# EAGLE board drone_controller (EAGLE 9.6.2)
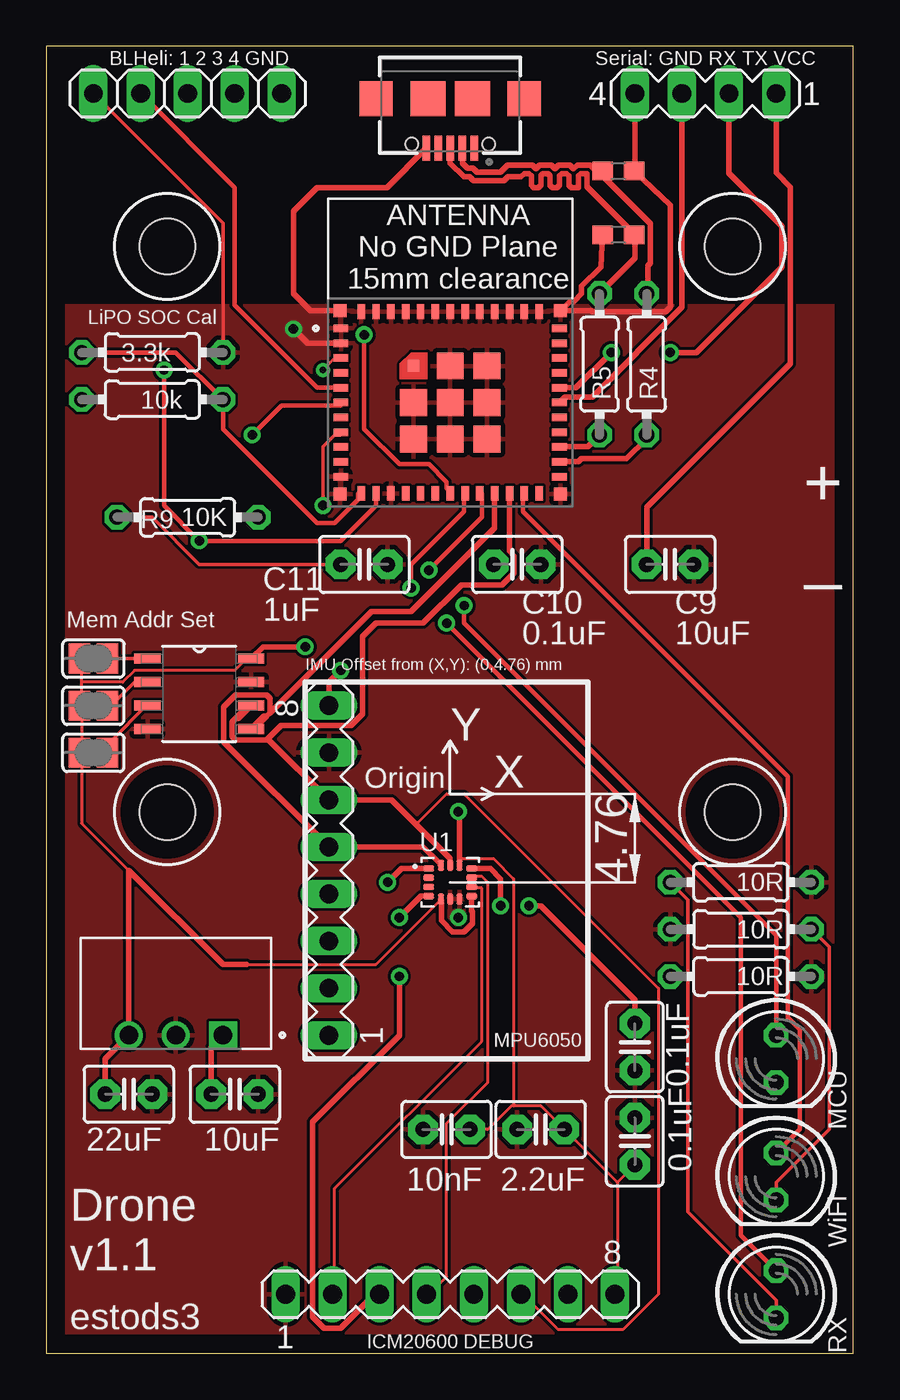
[diagram p0: board, top side]
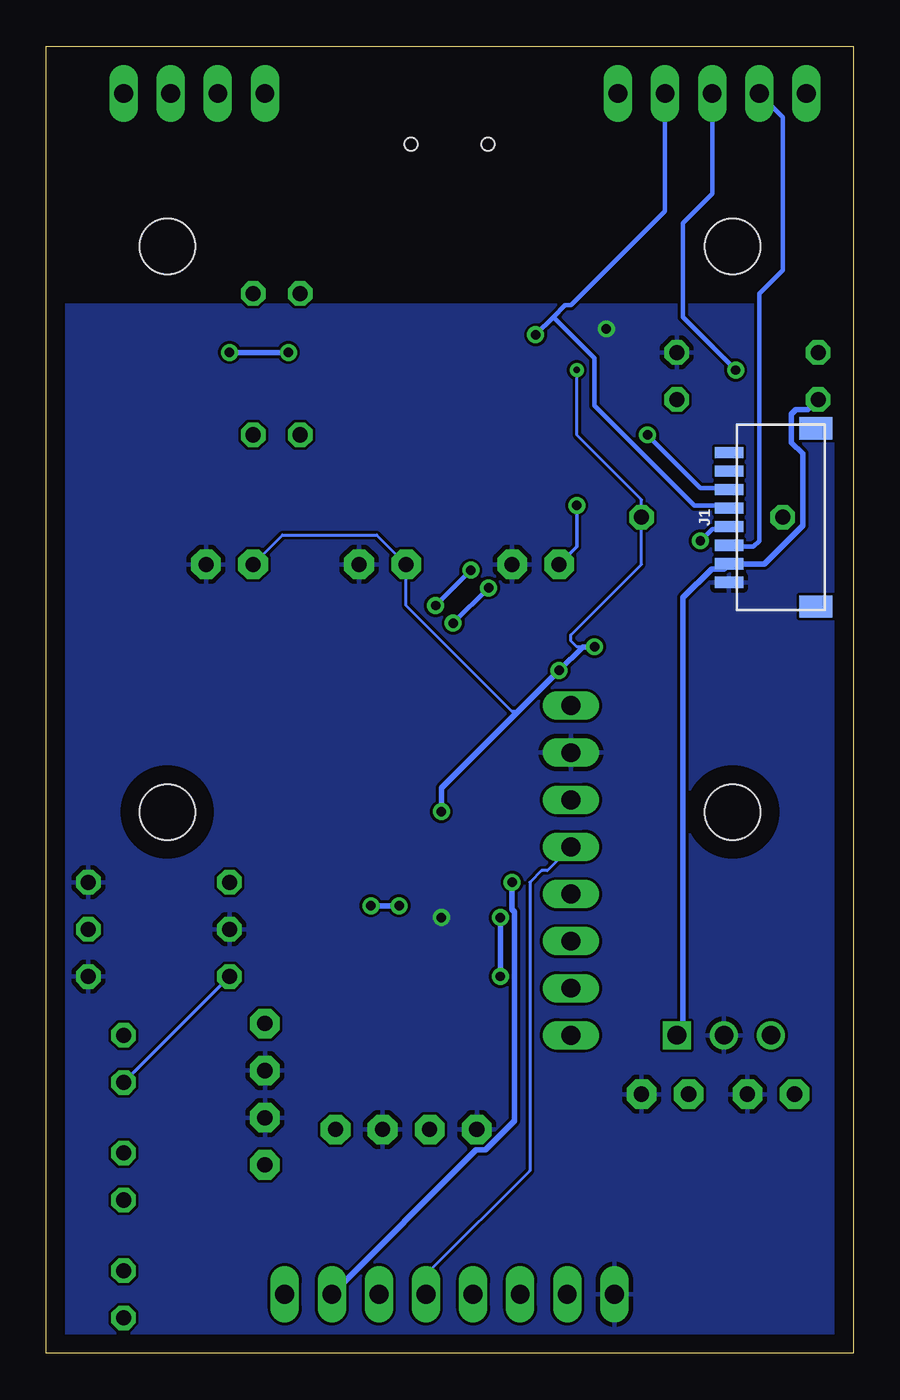
[diagram p1: board, bottom side, seen from below]

Size 43.54 x 70.49 mm. Coordinates in mm from the lower left corner, seen from the top.
Outline: 0,0 43.54,0 43.54,70.49 0,70.49 0,0
Copper layers (1*16): Top 0.035mm / dielectric 1.5mm / Bottom 0.035mm
Design rules "default": minimum track width 6mil, minimum drill 0.35mm, track to track 6mil, track to pad 6mil, pad to pad 6mil, via to via 6mil, smd to smd 6mil, copper to edge 40mil, drill to drill 6mil, minimum pad ring 10mil, minimum via ring 8mil, stop-mask expansion 4mil, vias tented up to drill 0mil, thermal gap 10mil
Net classes: 0 default: width 0.178 mm, drill 0.508 mm, clearance 0.051 mm; 1 Power: width 0.305 mm, drill 0.508 mm, clearance 0.254 mm; 3 Chip Power: width 0.025 mm, drill 0.051 mm, clearance 0.254 mm to class 2, clearance 0.127 mm; 4 GPIO: width 0.254 mm, drill 0.508 mm, clearance 0.254 mm to class 2, clearance 0.254 mm; 5 IMU: width 0.025 mm, drill 0.025 mm, clearance 0.025 mm to class 0
Holes 3 mm at 6.52,59.69 6.52,29.19 37.02,29.19 37.02,59.69

## Footprints (pad centres in the part's own frame; a part is rotated, then mirrored left to right if it is on the bottom)
C2.5-3 = drill 0.813 pad 1.6 octagon: 1 -1.27,0; 2 1.27,0
C0603 = smd 1.1 x 1: 1 -0.85,0; 2 0.85,0
SM08B-SRSS-TB = smd 0.6 x 1.55: 1 -3.5,4.675; 2 -2.5,4.675; 3 -1.5,4.675; 4 -0.5,4.675; 5 0.5,4.675; 6 1.5,4.675; 7 2.5,4.675; 8 3.5,4.675 | smd 1.2 x 1.8: M1 4.8,0; M2 -4.8,0
629105136821 = smd 0.4 x 1.35: 1 -1.3,2.325; 2 -0.65,2.325; 3 0,2.325; 4 0.65,2.325; 5 1.3,2.325 | smd 1.8 x 1.9: S1 -4,-0.35; S4 4,-0.35 | smd 1.9 x 1.9: S2 -1.2,-0.35; S3 1.2,-0.35 | hole 0.7: -2.075,2.1; 2.075,2.1
1X05 = drill 1.016 long: 1 -5.08,0; 2 -2.54,0; 3 0,0; 4 2.54,0; 5 5.08,0
LED5MM = drill 0.813 octagon: A -1.27,0; K 1.27,0
0204/7 = drill 0.813 octagon: 1 -3.81,0; 2 3.81,0
SJ = smd 1.168 x 1.6: 1 -0.762,0; 2 0.762,0
MA08-1 = drill 1.016 long: 1 -8.89,0; 2 -6.35,0; 3 -3.81,0; 4 -1.27,0; 5 1.27,0; 6 3.81,0; 7 6.35,0; 8 8.89,0
MA04-1 = drill 1.016 long: 1 -3.81,0; 2 -1.27,0; 3 1.27,0; 4 3.81,0
PQFN50P250X300X97-14N = smd 0.61 x 0.35: 1 -1.16,0.75; 2 -1.16,0.25; 3 -1.16,-0.25; 4 -1.16,-0.75; 8 1.16,-0.75; 9 1.16,-0.25; 10 1.16,0.25; 11 1.16,0.75 | smd 0.35 x 0.61: 5 -0.5,-0.91; 6 0,-0.91; 7 0.5,-0.91; 12 0.5,0.91; 13 0,0.91; 14 -0.5,0.91
CONV_PXO7803-500-S = drill 1 square: 1 0,0 | drill 1: 2 2.54,0; 3 5.08,0
SOIC127P600X175-8N = smd 1.422 x 0.533: 1 -2.794,1.905; 2 -2.794,0.635; 3 -2.794,-0.635; 4 -2.794,-1.905; 5 2.794,-1.905; 6 2.794,-0.635; 7 2.794,0.635; 8 2.794,1.905
XCVR_ESP32-C3-MINI-1-N4 = smd 0.8 x 0.4: 1 -5.9,1.3; 2 -5.9,0.5; 3 -5.9,-0.3; 4 -5.9,-1.1; 5 -5.9,-1.9; 6 -5.9,-2.7; 7 -5.9,-3.5; 8 -5.9,-4.3; 9 -5.9,-5.1; 10 -5.9,-5.9; 11 -5.9,-6.7; 25 5.9,-6.7; 26 5.9,-5.9; 27 5.9,-5.1; 28 5.9,-4.3; 29 5.9,-3.5; 30 5.9,-2.7; 31 5.9,-1.9; 32 5.9,-1.1; 33 5.9,-0.3; 34 5.9,0.5; 35 5.9,1.3 | smd 0.4 x 0.8: 12 -4.8,-7.6; 13 -4,-7.6; 14 -3.2,-7.6; 15 -2.4,-7.6; 16 -1.6,-7.6; 17 -0.8,-7.6; 18 0,-7.6; 19 0.8,-7.6; 20 1.6,-7.6; 21 2.4,-7.6; 22 3.2,-7.6; 23 4,-7.6; 24 4.8,-7.6; 36 4.8,2.2; 37 4,2.2; 38 3.2,2.2; 39 2.4,2.2; 40 1.6,2.2; 41 0.8,2.2; 42 0,2.2; 43 -0.8,2.2; 44 -1.6,2.2; 45 -2.4,2.2; 46 -3.2,2.2; 47 -4,2.2; 48 -4.8,2.2 | smd 0.6 x 0.6: 49_1 -1.975,-0.725 | smd 1.45 x 1.45: 49_2 0,-0.725; 49_3 1.975,-0.725; 49_4 1.975,-2.7; 49_5 1.975,-4.675; 49_6 0,-4.675; 49_7 -1.975,-4.675; 49_8 -1.975,-2.7; 49_9 0,-2.7 | smd 0.7 x 0.7: 50 5.95,2.25; 51 5.95,-7.65; 52 -5.95,-7.65; 53 -5.95,2.25

## Placement (x,y rotation side)
C1  10uF  [C2.5-3]  10.16,13.97 0 top
C2  22uF  [C2.5-3]  4.45,13.97 0 top
C3  0.1uF  [C0603]  30.86,63.75 0 top
C4  0.1uF  [C2.5-3]  31.75,11.43 90 top
C5  2.2uF  [C2.5-3]  26.67,12.07 180 top
C6  10nF  [C2.5-3]  21.59,12.07 180 top
C7  0.1uF  [C2.5-3]  31.75,16.51 270 top
C8  0.1uF  [C0603]  30.86,60.32 180 top
C9  10uF  [C2.5-3]  33.65,42.55 0 top
C10  0.1uF  [C2.5-3]  25.4,42.55 0 top
C11  1uF  [C2.5-3]  17.14,42.55 0 top
J1  SM08B-SRSS-TB  [SM08B-SRSS-TB]  2.03,45.08 90 bottom
J2  629105136821  [629105136821]  21.79,67.31 180 top
JP1  [1X05]  7.62,67.94 0 top
LED4  [LED5MM]  39.37,15.88 270 top
LED5  [LED5MM]  39.37,9.52 270 top
LED6  [LED5MM]  39.37,3.18 270 top
R1  10R  [0204/7]  37.46,22.86 180 top
R2  10R  [0204/7]  37.46,25.4 0 top
R3  10k  [0204/7]  5.71,51.44 180 top
R4  0R  [0204/7]  32.38,53.34 90 top
R5  0R  [0204/7]  29.84,53.34 90 top
R7  3.3k  [0204/7]  5.71,53.98 180 top
R8  10R  [0204/7]  37.46,20.32 0 top
R9  10K  [0204/7]  7.62,45.09 0 top
SJ1  [SJ]  2.54,37.47 0 top
SJ2  [SJ]  2.54,34.92 0 top
SJ3  [SJ]  2.54,32.38 0 top
SV1  [MA08-1]  21.79,3.18 0 top
SV2  [MA08-1]  15.24,26.04 90 top
SV3  [MA04-1]  35.56,67.94 180 top
U1  ICM-20600  [PQFN50P250X300X97-14N]  21.79,25.4 0 top
U2  PXO7803-500-S  [CONV_PXO7803-500-S]  9.53,17.14 180 top
U3  M24C02-WMN6TP  [SOIC127P600X175-8N]  8.26,35.56 0 top
U4  ESP32-C3-MINI-1-N4  [XCVR_ESP32-C3-MINI-1-N4]  21.79,53.98 0 top

## Library data of the parts
C1 C2 C4-C7 C9-C11 = capacitor-wima
C3 C8 = rcl; SPICEPREFIX: C
J1 = con-JST-SH
J2 = Eagle_WR-USB (rev22c); APPLICATION: Micro USB 2.0; DATASHEET-URL: https://www.we-online.com/redexpert/spec/629105136821?ae; GERDER: Receptacle; INTERFACE-TYPE: Type B; IR: 1.0A; MOUNT: SMT; PACKAGING: Tape and Reel; PART-NUMBER: 629105136821; PINS: 5; TYPE: Horizontal; WORKING-VOLTAGE: 30V(AC)
JP1 = pinhead
LED4-LED6 = led
R1-R5 R7-R9 = rcl; SPICEPREFIX: R
SJ1-SJ3 = jumper
SV1-SV3 = con-lstb; OC_FARNELL: unknown; OC_NEWARK: unknown
U1 = ICM-20600; AVAILABILITY: In Stock; DESCRIPTION: Accelerometer, Gyroscope, 6 Axis Sensor I²C, SPI Output; MF: TDK InvenSense; MP: ICM-20600; PACKAGE: PQFN-14N TDK-InvenSense; PRICE: None; PURCHASE-URL: https://pricing.snapeda.com/search/part/ICM-20600/?ref=eda
U2 = PXO7803-500-S; MANUFACTURER: CUI; MAXIMUM_PACKAGE_HEIGHT: 8.61mm; PARTREV: 08/22/2022; SNAPEDA_PN: PXO7803-500-S; STANDARD: Manufacturer Recommendations
U3 = M24C02-WMN6TP; AVAILABILITY: In Stock; DESCRIPTION: EEPROM Memory IC 2Kb (256 x 8) I²C 400 kHz 900 ns 8-SOIC; MF: STMicroelectronics; MP: M24C02-WMN6TP; PACKAGE: SO-8 STMicroelectronics; PRICE: None; PURCHASE-URL: https://pricing.snapeda.com/search?q=M24C02-WMN6TP&ref=eda
U4 = ESP32-C3-MINI-1-N4; AVAILABILITY: In Stock; DESCRIPTION: Bluetooth, WiFi 802.11b/g/n, Bluetooth v5.0 Transceiver Module 2.412GHz ~ 2.484GHz PCB Trace Surface Mount; MF: Espressif Systems; MP: ESP32-C3-MINI-1-N4; PACKAGE: SMD-53 Espressif Systems; PRICE: None; PURCHASE-URL: https://pricing.snapeda.com/search?q=ESP32-C3-MINI-1-N4&ref=eda

## Nets
3V3 [IMU]: C2.1 C4.1 C5.1 C6.1 C9.1 C10.1 R9.2 SJ1.1 SJ2.1 SJ3.1 SV1.8 SV2.8 SV3.1 U1.5 U1.8 U1.12 U2.3 U3.8 U4.3
AD0 [IMU]: SV1.7 U1.1
CURR: J1.7
FSYNC [IMU]: SV1.4 U1.10
GND: C1.2 C2.2 C3.2 C4.2 C5.2 C6.2 C7.2 C8.2 C9.2 C10.2 C11.2 J1.1 J2.5 JP1.1 R1.2 R2.2 R7.1 R8.2 SV1.1 SV2.7 SV3.4 U1.6 U1.7 U2.2 U3.4 U3.7 U4.1 U4.2 U4.11 U4.14 U4.36 U4.37 U4.38 U4.39 U4.40 U4.41 U4.42 U4.43 U4.44 U4.45 U4.46 U4.47 U4.48 U4.49_1 U4.49_2 U4.49_3 U4.49_4 U4.49_5 U4.49_6 U4.49_7 U4.49_8 U4.49_9 U4.50 U4.51 U4.52 U4.53
GPIO_BATT_SOC [GPIO]: R3.1 R7.2 U4.12
GPIO_LED_HEARTBEAT [GPIO]: LED4.A U4.20
GPIO_LED_WIFI_CONN [GPIO]: LED5.A U4.23
GPIO_LED_WIFI_RX [GPIO]: LED6.A U4.19
INT1 [IMU]: SV1.3 U1.4
INT2 [IMU]: SV1.2 U1.9
N$1: C7.1 U1.11
N$2: JP1.5
N$3: C11.1 R9.1 U4.8
N$6: SJ1.2 U3.1
N$7: SJ2.2 U3.2
N$8: SJ3.2 U3.3
N$9: LED5.K R1.1
N$10: LED4.K R8.1
N$14: LED6.K R2.1
PWM_MOTOR_FL [GPIO]: J1.4 JP1.3 U4.13
PWM_MOTOR_FR [GPIO]: J1.3 JP1.2 U4.5
PWM_MOTOR_RL [GPIO]: J1.6 U4.6
PWM_MOTOR_RR [GPIO]: J1.5 JP1.4 U4.18
RX: SV3.3 U4.30
SCL [IMU]: SV1.6 SV2.6 U1.13 U3.6 U4.22
SDA [IMU]: SV1.5 SV2.5 U1.14 U3.5 U4.21
TEL: J1.8
TX: SV3.2 U4.31
USB_D_N [USB]: C3.1 J2.2 R4.2
USB_D_P [USB]: C8.1 J2.3 R5.2
USB_RD_N: R4.1 U4.26
USB_RD_P: R5.1 U4.27
USB_VCC [Power]: J2.1
VCC [Power]: C1.1 J1.2 R3.2 U2.1

## Tracks (layer width: path | path; a pad name or v marks a point on that pad's centre or on a via)
3V3  (via drill 0.35, 0.51)
  Top 0.152: 10.79,20.95 17.78,20.95 21.27,24.45 U1.5 | C6.1 23.81,12.07 25.08,13.34 25.21,13.34 | 25.21,13.34 26.67,13.34 C5.1 30.8,9.21 | 30.8,9.21 30.8,3.18 SV1.8 | C4.1 30.8,9.21 | v14.92,53.02 15.56,53.66 15.88,53.66 U4.3 | 1.9,34.92 1.9,32.38 | 1.9,34.92 1.9,36.2 | 1.9,36.2 1.9,37.47 SJ1.1 | 1.9,34.92 SJ2.1 | 1.9,36.2 4.13,36.2 4.76,36.83 10.16,36.83 10.79,37.47 U3.8 | 25.21,13.34 25.21,25.59 24.13,26.67 22.29,26.67 22.23,26.67 | 4.45,26.04 1.9,28.58 1.9,32.38 | 1.9,32.38 SJ3.1
  Top 0.305: C9.1 32.38,45.62 40.14,53.38 40.14,62.89 39.37,63.66 SV3.1 | SV2.8 15.24,36.2 v15.88,36.83 | U3.8 11.68,38.1 v13.97,38.1 | v22.23,29.21 22.29,29.15 22.29,26.67 U1.12 | 21.27,24.45 21.31,24.41 21.31,23.33 21.91,22.73 22.54,22.73 22.99,23.18 22.99,23.81 22.95,23.85 U1.8 | C2.1 3.18,15.88 U2.3 4.45,26.04 9.53,20.95 10.79,20.95
  Bottom 0.152: v14.92,53.02 14.92,49.53 11.43,46.04 R9.2 11.43,42.55 15.24,38.73 15.24,38.42 14.92,38.1 14.61,38.1 | C9.1 30.8,44.13 25.72,44.13 C10.1 24.13,40.32 18.41,34.61 18.1,34.61
  Bottom 0.305: v13.97,38.1 14.61,38.1 v15.88,36.83 18.1,34.61 22.23,30.48 v22.23,29.21
AD0  (via drill 0.51)
  Top 0.305: U1.1 19.16,26.15 v18.41,25.4
  Bottom 0.305: v18.41,25.4 18.41,23.94 18.29,23.81 18.29,12.53 19.86,10.96 20.35,10.96 SV1.7
FSYNC
  Top 0.152: U1.10 23.18,25.72 23.5,25.72 23.81,25.4 23.81,14.61 21.59,12.38 21.59,4.13 20.64,3.18 SV1.4
GND  (via drill 0.51)
  Top 0.178: JP1.1 9.53,60.96 R7.1
  Top 0.305: C8.2 29.91,58.58 28.88,57.55 28.88,57.15 28.45,56.72 28.23,56.72 U4.50 29.41,56.23 29.45,56.18 33.42,56.18 33.65,56.42 33.65,61.91 C3.2 31.75,63.82 SV3.4 | J2.5 18.37,62.87 14.61,62.87 13.34,61.6 13.34,57.15 14.26,56.23 U4.53 | U4.2 14.11,54.48 v13.34,55.24
  other vias: 22.23,23.49
  pour Top: -1.27,56.51 44.45,56.51 44.45,0 -1.27,0
  pour Bottom: -1.27,56.51 44.45,56.51 44.45,0 -1.27,0
GPIO_BATT_SOC
  Top 0.254: U4.12 16.83,46.35 16.83,46.04 15.56,44.77 14.61,44.77 9.53,49.85 R3.1 6.99,53.98 R7.2
GPIO_LED_HEARTBEAT  (via drill 0.51)
  Top 0.254: v20.64,42.23 23.5,45.09 23.5,46.35 U4.20 | v22.54,40.32 22.54,39.37 39.37,22.54 LED4.A
  Bottom 0.254: v22.54,40.32 v20.64,42.23
GPIO_LED_WIFI_CONN
  Top 0.254: LED5.A 40.64,12.07 40.64,17.46 40,18.1 40,31.12 25.72,45.4 25.72,46.35 U4.23
GPIO_LED_WIFI_RX  (via drill 0.51)
  Top 0.254: v19.68,41.27 19.68,42.55 22.54,45.4 22.54,46.35 U4.19 | v21.59,39.37 37.46,23.49 37.46,6.35 LED6.A
  Bottom 0.254: v21.59,39.37 v19.68,41.27
INT1  (via drill 0.51)
  Top 0.305: U1.4 20.21,24.65 v19.05,23.49 | SV1.3 17.71,3.18 15.88,1.35 15,1.35 14.37,1.97 14.37,12.47 19.05,17.14 v19.05,20.32
  Bottom 0.305: v19.05,20.32 v19.05,23.49
INT2
  Top 0.152: U1.9 23.18,25.08 23.5,25.08 23.5,16.83 15.56,8.89 15.56,3.18 SV1.2
N$1  (via drill 0.51)
  Top 0.305: U1.11 23.95,26.15 24.51,25.59 v24.51,24.13 | C7.1 31.75,19.05 26.67,24.13 v26.04,24.13
  Bottom 0.305: v24.51,24.13 v26.04,24.13
N$3  (via drill 0.51)
  Top 0.178: v14.92,45.72 14.92,48.9 15.56,49.53 15.88,49.53 U4.8 | R9.1 5.71,45.09 8.26,42.55 C11.1
  Bottom 0.178: v14.92,45.72 14.92,43.5 C11.1
N$6
  Top 0.178: SJ1.2 U3.1
N$7
  Top 0.178: U3.2 4.76,36.2 3.49,34.92 SJ2.2
N$8
  Top 0.178: U3.3 5.4,34.92 3.49,33.02 3.49,32.38 SJ3.2
N$9
  Top 0.178: LED5.K 39.37,9.21 42.23,12.07 42.23,21.91 R1.1
N$10
  Bottom 0.178: LED4.K R8.1
N$14
  Top 0.178: LED6.K 39.37,2.86 34.61,7.62 34.61,24.45 R2.1
PWM_MOTOR_FL  (via drill 0.51)
  Top 0.254: U4.13 17.78,46.35 17.78,45.72 15.88,43.81 v8.26,43.81 6.35,45.72 v6.35,53.02
  Bottom 0.254: v8.26,43.81 7.62,44.45 6.99,44.45 J1.4 | JP1.3 7.62,62.55 9.21,60.96 9.21,55.88 v6.35,53.02
PWM_MOTOR_FR
  Top 0.254: JP1.2 10.16,62.87 10.16,56.51 14.61,52.07 15.88,52.07 U4.5
  Bottom 0.254: JP1.2 3.81,66.68 3.81,58.42 5.08,57.15 5.08,43.81 5.4,43.5 6.67,43.5 J1.3
PWM_MOTOR_RL  (via drill 0.51)
  Top 0.254: v11.11,49.53 12.7,51.12 15.88,51.12 U4.6
  Bottom 0.254: v11.11,49.53 8.26,46.67 6.99,46.67 J1.6
PWM_MOTOR_RR  (via drill 0.51)
  Top 0.254: v17.14,54.93 17.14,49.85 19.05,47.94 20.64,47.94 21.59,46.99 21.59,46.67 U4.18
  Bottom 0.254: 16.19,55.88 15.56,56.51 15.24,56.51 10.16,61.6 JP1.4 | 16.19,55.88 v17.14,54.93 | 16.19,55.88 13.97,53.66 13.97,51.12 8.57,45.72 6.99,45.72 J1.5
RX
  Top 0.305: U4.30 27.98,51.57 29.45,51.57 34.29,56.41 SV3.3
SCL
  Top 0.152: 19.94,28.52 21.59,30.16 22.54,30.16 33.02,19.68 33.02,3.18 31.11,1.27 27.62,1.27 25.72,3.18 SV1.6
  Top 0.305: U4.22 24.99,43.25 25.23,43 25.23,42.09 24.59,41.44 22.39,41.44 20.32,39.37 17.78,39.37 17.07,38.66 17.07,34.48 16.44,33.86 12.66,33.86 11.89,33.08 | 10.21,34.23 10.91,34.92 U3.6 10.35,34.23 10.21,34.23 | U1.13 21.77,26.33 21.77,26.69 19.94,28.52 18.61,29.84 SV2.6 12,33.08 11.89,33.08 | 11.89,33.08 10.21,33.08 10.03,33.26 10.03,34.05 10.21,34.23
SDA
  Top 0.305: 11.89,34.35 11.75,34.35 U3.5 11.19,33.66 11.89,34.35 | 12.07,34.53 17.54,40.01 19.68,40.01 24.19,44.51 U4.21 | U1.14 21.24,26.36 21.24,26.4 20.33,27.3 SV2.5 9.58,32.97 9.58,34.86 10.21,35.5 11.89,35.5 12.07,35.32 12.07,34.53 | 12.07,34.53 11.89,34.35
  Bottom 0.152: SV2.5 16.51,26.04 16.83,26.04 17.46,25.4 17.46,9.84 22.86,4.45 22.86,3.18 SV1.5
TX  (via drill 0.51)
  Top 0.305: U4.31 28.58,52.08 v30.48,53.98 | SV3.2 36.83,63.65 39.69,60.79 39.69,58.59 35.08,53.98 v33.65,53.98
  Bottom 0.305: v30.48,53.98 v33.65,53.98
USB_D_N
  Top 0.305: 30.23,63.75 C3.1 | 29.91,63.43 C3.1 | 29.66,63.5 C3.1 | 29.91,63.43 30.08,63.43 32.6,60.92 32.6,58.79 32.46,58.65 32.46,57.23 R4.2 | 29.91,63.43 29.61,63.73 29.61,63.82 29.35,64.08 28.64,64.08 28.45,63.89 28.26,64.08 27.62,64.08 27.43,63.89 27.24,64.08 26.61,64.08 26.42,63.89 26.22,64.08 24.88,64.08 24.49,63.69 23.23,63.69 23.02,63.9 22.86,63.9 22.72,63.9 22.44,64.19 J2.2
USB_D_P
  Top 0.305: 31.75,60.39 C8.1 | 31.75,60.39 31.75,59.05 R5.2 | J2.3 21.79,64.19 22.53,63.45 22.83,63.45 23.05,63.23 24.68,63.23 24.89,63.45 25.6,63.45 25.78,63.63 26.04,63.63 26.16,63.5 26.16,62.99 26.29,62.87 26.54,62.87 26.67,62.99 26.67,63.5 26.8,63.63 27.05,63.63 27.18,63.5 27.18,62.99 27.3,62.87 27.56,62.87 27.69,62.99 27.69,63.5 27.81,63.63 28.07,63.63 28.19,63.5 28.19,62.99 28.32,62.87 28.7,62.87 28.7,63.5 28.83,63.63 29.16,63.63 29.16,62.92 31.69,60.39 31.75,60.39
USB_RD_N
  Top 0.305: U4.26 28.7,48.08 28.88,48.26 31.3,48.26 32.38,49.34 R4.1
USB_RD_P
  Top 0.305: U4.27 27.71,48.9 29.21,48.9 R5.1
VCC
  Top 0.305: U2.1 8.89,16.51 C1.1
  Bottom 0.305: R3.2 2.46,50.88 3.1,50.88 3.34,50.64 3.34,49.11 2.74,48.51 2.74,44.64 4.81,42.58 J1.2 7,42.28 7.65,42.28 9.19,40.74 9.19,17.48 U2.1

## Text on the board
tPlace: BLHeli: 1 2 3 4 GND | Serial: GND RX TX VCC | ANTENNA / No GND Plane / 15mm clearance | LiPO SOC Cal | + / _ | Mem Addr Set | IMU Offset from (X,Y): (0,4.76) mm | Y | Origin | X | MPU6050 | MCU | WiFi | Drone / v1.1 | estods3 | ICM20600 DEBUG | RX